# EAGLE board SGWB Circuit Test Board (EAGLE 9.5.0)
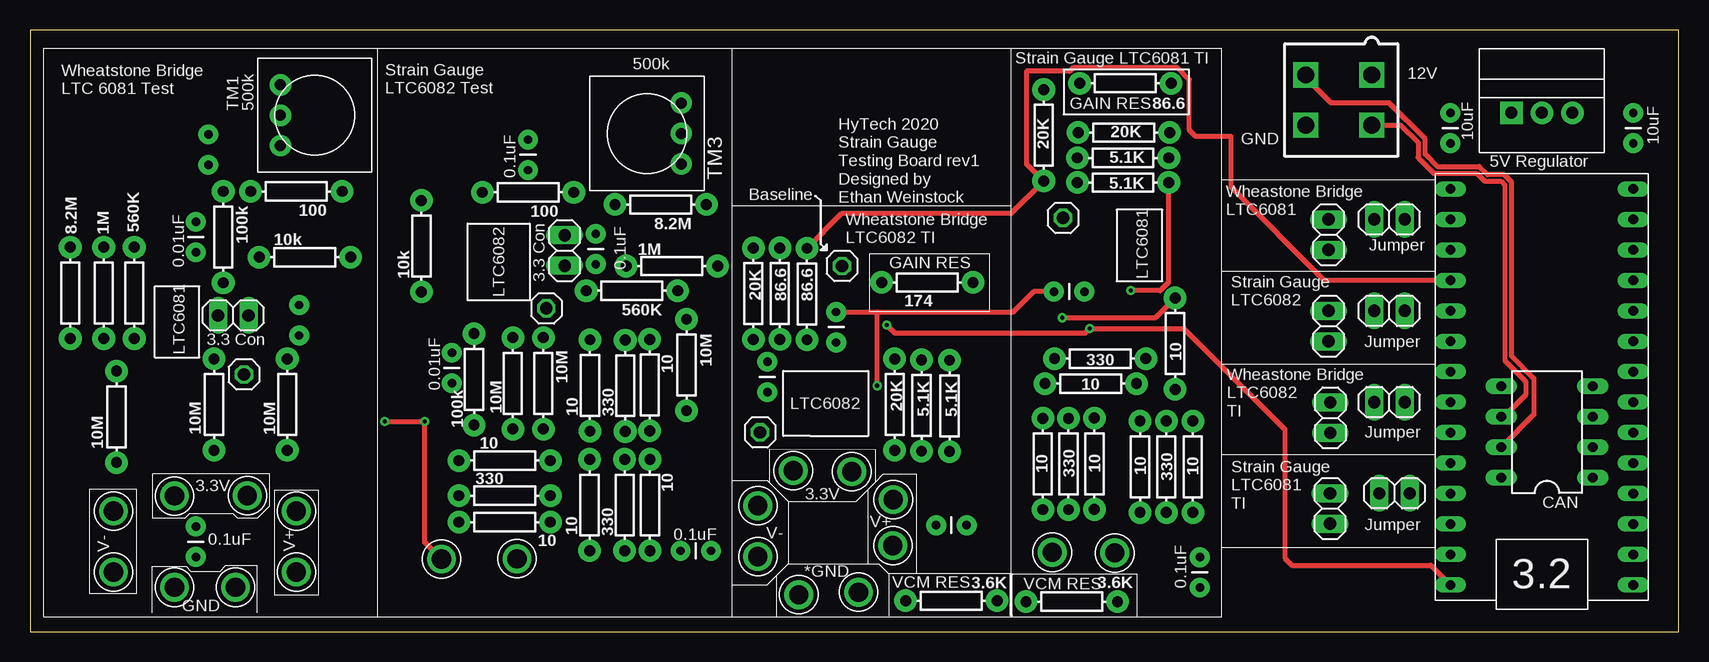
[diagram p0: board, top side]
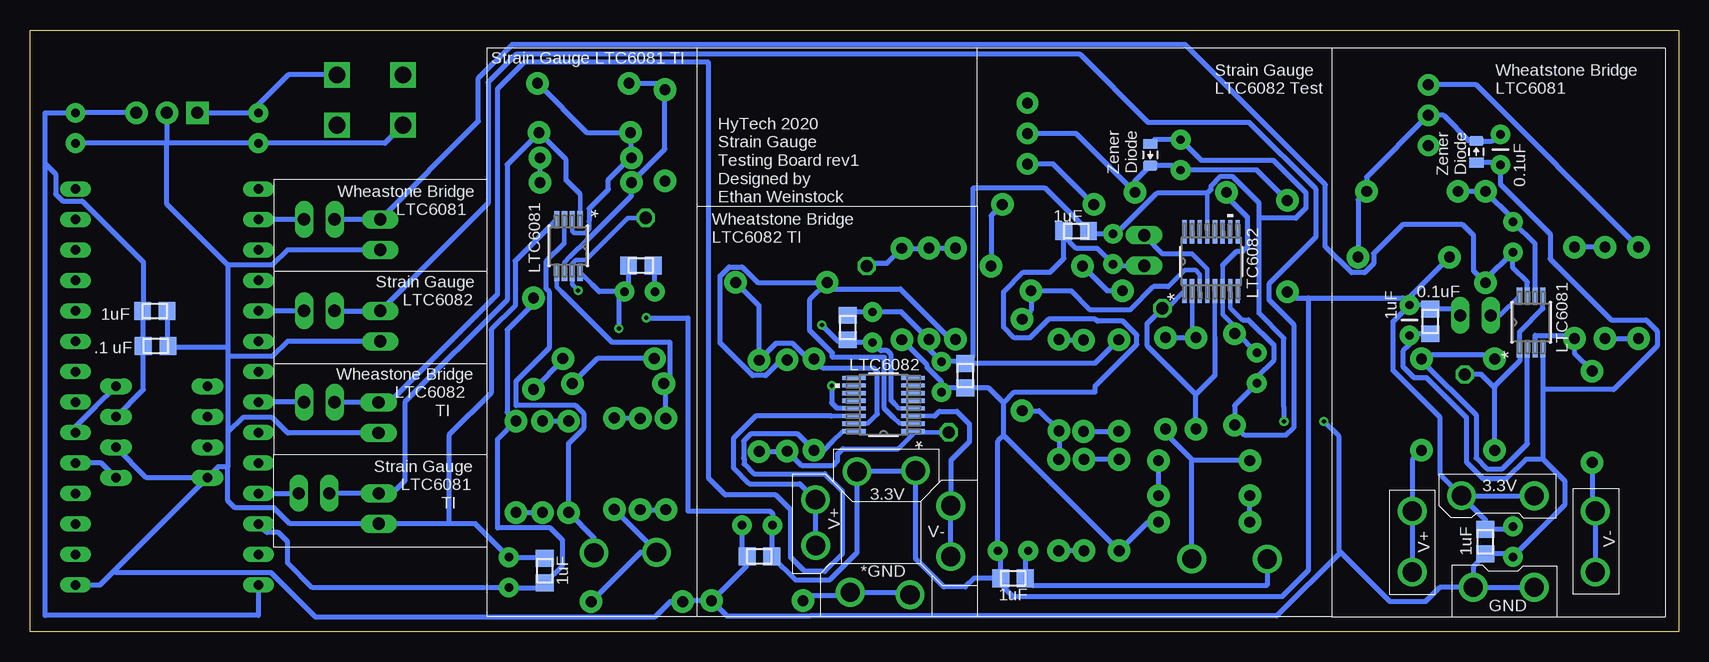
[diagram p1: board, bottom side, seen from below]

Size 137.39 x 50.19 mm. Coordinates in mm from the lower left corner, seen from the top.
Outline: 0,0 137.39,0 137.39,50.19 0,50.19 0,0
Copper layers (1*16): Top 0.035mm / dielectric 1.5mm / Bottom 0.035mm
Design rules "DRC Advanced Circuits": minimum track width 6mil, minimum drill 10mil, track to track 6mil, track to pad 6mil, pad to pad 6mil, via to via 6mil, smd to smd 6mil, copper to edge 40mil, drill to drill 6mil, minimum pad ring 10mil, minimum via ring 8mil, stop-mask expansion 4mil, vias tented up to drill 0mil, thermal gap 10mil

## Footprints (pad centres in the part's own frame; a part is rotated, then mirrored left to right if it is on the bottom)
0805 = smd 1.4 x 1.5: 1 -1.025,0; 2 1.025,0
CAP-PTH-SMALL = drill 0.7 pad 1.651: 1 0,0; 2 2.54,0
1X02 = drill 1.016 long: 1 -1.27,0; 2 1.27,0
0805_D = smd 0.8 x 1.2: A -0.9,0; C 0.9,0
AXIAL-0.3 = drill 0.9 pad 1.88: P$1 -3.81,0; P$2 3.81,0
OKI-78SR = drill 1 pad 1.88 square: 1 -2.54,0 | drill 1 pad 1.88: 2 0,0; 3 2.54,0
TRIM-3386 = drill 0.9 pad 1.778: 1 -2.54,-2.857; 2 0,-2.857; 3 2.54,-2.857
SSOP-16_GN = smd 1.981 x 0.356: 1 -2.464,2.223; 2 -2.464,1.587; 3 -2.464,0.953; 4 -2.464,0.318; 5 -2.464,-0.318; 6 -2.464,-0.953; 7 -2.464,-1.587; 8 -2.464,-2.223; 9 2.464,-2.223; 10 2.464,-1.587; 11 2.464,-0.953; 12 2.464,-0.318; 13 2.464,0.318; 14 2.464,0.953; 15 2.464,1.587; 16 2.464,2.223
MSOP-8_MS = smd 1.397 x 0.432: 1 -2.21,0.975; 2 -2.21,0.325; 3 -2.21,-0.325; 4 -2.21,-0.975; 5 2.21,-0.975; 6 2.21,-0.325; 7 2.21,0.325; 8 2.21,0.975
TEENSY_3.2_SIMPLE = drill 0.8 long: 3.3V 16.51,29.21; A0 16.51,3.81; A1 16.51,6.35; A2 16.51,8.89; A3 16.51,11.43; A4 16.51,13.97; A5 16.51,16.51; A6 16.51,19.05; A7 16.51,21.59; A8 16.51,24.13; A9 16.51,26.67; AGND 16.51,31.75; D0(RX1) 1.27,31.75; D1(TX1) 1.27,29.21; D2 1.27,26.67; D3(CANTX) 1.27,24.13; D4(CANRX) 1.27,21.59; D5 1.27,19.05; D6 1.27,16.51; D7(RX3) 1.27,13.97; D8(TX3) 1.27,11.43; D9(RX2) 1.27,8.89; D10(TX2) 1.27,6.35; D11 1.27,3.81; D12 1.27,1.27; D13 16.51,1.27; GND 1.27,34.29; VIN 16.51,34.29
DIL08 = drill 0.813 long: 1 -3.81,-3.81; 2 -1.27,-3.81; 3 1.27,-3.81; 4 3.81,-3.81; 5 3.81,3.81; 6 1.27,3.81; 7 -1.27,3.81; 8 -3.81,3.81
TEST_POINT = drill 1.6: P$1 0,0
1X01 = drill 1.016 octagon: 1 0,0
MINIFIT_5566-4 = drill 1.4 square: 1 2.1,-2.75; 2 -2.1,-2.75; 3 2.1,2.75; 4 -2.1,2.75

## Placement (x,y rotation side)
C1  0.1uF  [0805]  20.7,25.88 90 bottom
C2  0.01uF  [CAP-PTH-SMALL]  13.82,34.19 270 top
C3  0.1uF  [CAP-PTH-SMALL]  14.86,38.94 90 bottom
C4  1uF  [CAP-PTH-SMALL]  22.43,27.25 270 bottom
C5  10uF  [CAP-PTH-SMALL]  118.36,40.74 90 top
C6  10uF  [CAP-PTH-SMALL]  133.6,40.74 90 top
C7  .1 uF  [0805]  126.92,23.85 180 bottom
C8  1uF  [0805]  127,26.75 180 bottom
C9  1uF  [0805]  86.49,30.56 0 bottom
C10  0.1uF  [CAP-PTH-SMALL]  85.32,28.37 0 top
C11  0.1uF  [CAP-PTH-SMALL]  56.74,6.76 180 top
C12  1uF  [0805]  55.47,4.47 0 bottom
C13  0.1uF  [CAP-PTH-SMALL]  75.51,8.89 0 top
C14  0.01uF  [CAP-PTH-SMALL]  35.15,23.27 270 top
C15  0.1uF  [CAP-PTH-SMALL]  47.14,33.2 270 top
C16  1uF  [0805]  50.22,33.4 0 bottom
C17  0.1uF  [CAP-PTH-SMALL]  41.5,41.05 270 top
C18  1uF  [0805]  76.61,6.3 180 bottom
C19  1uF  [0805]  59.44,21.36 90 bottom
C20  1uF  [0805]  69.27,25.37 90 bottom
C21  0.1uF  [CAP-PTH-SMALL]  13.82,8.79 270 top
C22  1uF  [0805]  16.1,7.52 270 bottom
C23  0.1uF  [CAP-PTH-SMALL]  67.18,26.67 270 top
C24  0.1uF  [CAP-PTH-SMALL]  61.44,22.53 270 top
C26  0.1uF  [CAP-PTH-SMALL]  97.49,3.68 90 top
C27  1uF  [0805]  94.49,5.11 90 bottom
J1  JUMPER.1  [1X02]  113.28,34.39 180 top
J2  JUMPER.1  [1X02]  113.28,26.77 180 top
J3  JUMPER.1  [1X02]  113.28,19.15 180 top
J4  JUMPER.1  [1X02]  113.72,11.56 180 top
J5  JUMPER.1  [1X02]  44.55,31.8 90 top
J6  JUMPER.1  [1X02]  16.94,26.39 180 top
JP1  M02  [1X02]  108.2,33.12 90 top
JP2  M02  [1X02]  108.36,17.86 90 top
JP3  M02  [1X02]  108.2,25.5 90 top
JP4  M02  [1X02]  108.33,10.29 90 top
LT1790B  1.25V  [0805_D]  16.87,40.03 90 bottom
LT1790B2  1.25V  [0805_D]  44.04,39.78 270 bottom
R1  10M  [AXIAL-0.3]  21.44,18.95 90 top
R1_1  5.1K  [AXIAL-0.3]  91.08,39.52 0 top
R1_2  20K  [AXIAL-0.3]  91.16,41.63 0 top
R1_3  5.1K  [AXIAL-0.3]  91.08,37.46 0 top
R1_4  20K  [AXIAL-0.3]  84.48,41.4 90 top
R1_5  20K  [AXIAL-0.3]  60.27,28.19 270 top
R1_6  5.1K  [AXIAL-0.3]  76.63,18.85 270 top
R1_7  20K  [AXIAL-0.3]  72.06,18.95 270 top
R1_8  5.1K  [AXIAL-0.3]  74.29,18.87 270 top
R1_9  174  [AXIAL-0.3]  74.78,29.13 0 top
R1_11  86.6  [AXIAL-0.3]  91.29,45.75 0 top
R2  10M  [AXIAL-0.3]  7.21,17.93 90 top
R3  8.2M  [AXIAL-0.3]  3.35,28.27 90 top
R4  10M  [AXIAL-0.3]  15.34,18.95 90 top
R5  100k  [AXIAL-0.3]  16.1,32.92 270 top
R6  100  [AXIAL-0.3]  22.2,36.73 180 top
R7  10k  [AXIAL-0.3]  22.91,31.24 180 top
R9  3.6K  [AXIAL-0.3]  86.82,2.51 0 top
R10  330  [AXIAL-0.3]  94.69,13.77 270 top
R11  10  [AXIAL-0.3]  96.9,13.77 90 top
R12  10  [AXIAL-0.3]  92.51,13.77 90 top
R14  86.6  [AXIAL-0.3]  64.74,28.17 270 top
R15  10  [AXIAL-0.3]  39.55,14.27 0 top
R16  10  [AXIAL-0.3]  51.66,10.57 90 top
R17  10  [AXIAL-0.3]  51.64,20.57 270 top
R18  10M  [AXIAL-0.3]  42.77,20.73 90 top
R19  10M  [AXIAL-0.3]  54.71,22.25 90 top
R20  8.2M  [AXIAL-0.3]  52.55,35.64 180 top
R21  10M  [AXIAL-0.3]  40.23,20.73 90 top
R22  100k  [AXIAL-0.3]  37.01,21.06 270 top
R23  100  [AXIAL-0.3]  41.5,36.65 180 top
R24  10k  [AXIAL-0.3]  32.61,32.16 270 top
R25  10  [AXIAL-0.3]  95.43,24.03 270 top
R26  86.6  [AXIAL-0.3]  62.48,28.19 90 top
R27  330  [AXIAL-0.3]  86.54,14 270 top
R28  10  [AXIAL-0.3]  46.63,10.57 90 top
R29  3.6K  [AXIAL-0.3]  76.78,2.59 180 top
R31  10  [AXIAL-0.3]  88.39,20.7 180 top
R32  10  [AXIAL-0.3]  84.4,14 90 top
R39  330  [AXIAL-0.3]  49.61,20.52 90 top
R40  10  [AXIAL-0.3]  39.55,9.14 0 top
R41  330  [AXIAL-0.3]  89.18,22.78 180 top
R42  10  [AXIAL-0.3]  88.7,14.02 90 top
R44  330  [AXIAL-0.3]  49.56,10.57 270 top
R45  10  [AXIAL-0.3]  46.66,20.55 270 top
R46  330  [AXIAL-0.3]  39.55,11.35 180 top
R49  1M  [AXIAL-0.3]  53.49,30.51 180 top
R50  560K  [AXIAL-0.3]  50.16,28.45 180 top
R53  1M  [AXIAL-0.3]  6.15,28.27 90 top
R54  560K  [AXIAL-0.3]  8.69,28.27 90 top
REG  5V  [OKI-78SR]  125.98,43.28 0 top
TM1  500k  [TRIM-3386]  23.72,43.08 270 top
TM3  500k  [TRIM-3386]  51.41,41.55 90 top
U1  LTC6082CGNPBF  [SSOP-16_GN]  38.96,30.89 90 bottom
U2  LTC6082CGNPBF  [SSOP-16_GN]  66.27,18.95 180 bottom
U$1  LTC6081  [MSOP-8_MS]  12.29,25.81 90 bottom
U$2  TEENSY_3.2_SIMPLE  [TEENSY_3.2_SIMPLE]  134.87,38.2 180 top
U$3  MCP2551DIL  [DIL08]  126.42,16.66 90 top
U$4  TEST_POINT  [TEST_POINT]  68.48,13.36 0 top
U$5  TEST_POINT  [TEST_POINT]  90.4,6.58 0 top
U$6  TEST_POINT  [TEST_POINT]  85.19,6.63 0 top
U$7  TEST_POINT  [TEST_POINT]  71.93,11.02 270 top
U$8  TEST_POINT  [TEST_POINT]  34.29,6.07 0 top
U$9  LTC6081  [MSOP-8_MS]  92.53,32.18 270 bottom
U$10  TEST_POINT  [TEST_POINT]  40.59,6.1 0 top
U$11  TEST_POINT  [TEST_POINT]  12.04,11.33 0 top
U$12  TEST_POINT  [TEST_POINT]  22.2,4.98 270 top
U$13  TEST_POINT  [TEST_POINT]  22.2,10.06 270 top
U$14  TEST_POINT  [TEST_POINT]  17.12,3.71 0 top
U$15  TEST_POINT  [TEST_POINT]  12.04,3.71 0 top
U$16  TEST_POINT  [TEST_POINT]  6.96,10.06 90 top
U$17  TEST_POINT  [TEST_POINT]  6.96,4.98 90 top
U$18  TEST_POINT  [TEST_POINT]  18.11,11.35 0 top
U$19  TEST_POINT  [TEST_POINT]  71.91,7.19 270 top
U$20  TEST_POINT  [TEST_POINT]  69.04,3.3 0 top
U$21  TEST_POINT  [TEST_POINT]  64.06,3.1 0 top
U$22  TEST_POINT  [TEST_POINT]  60.66,10.52 270 top
U$23  TEST_POINT  [TEST_POINT]  60.66,6.27 270 top
U$24  TEST_POINT  [TEST_POINT]  63.6,13.44 0 top
U$25  M01  [1X01]  86.08,34.52 0 top
U$26  M01  [1X01]  60.83,16.64 0 top
U$27  M01  [1X01]  43.03,26.97 0 top
U$28  M01  [1X01]  17.83,21.46 0 top
U$29  M01  [1X01]  67.67,30.51 0 top
X1  CONNECTOR-4  [MINIFIT_5566-4]  109.07,44.35 90 top

## Library data of the parts
C1-C24 C26 C27 J1-J6 JP1-JP4 LT1790B LT1790B2 R1 R1_1-R1_9 R1_11 R2-R7 R9-R12 R14-R29 R31 R32 R39-R42 R44-R46 R49 R50 R53 R54 REG TM1 TM3 U$1-U$29 = HyTechDevices
U1 U2 = HyTechDevices; MANUFACTURER_PART_NUMBER: LTC6082CGN#PBF; VENDOR: Linear Technology
X1 = HyTechDevices; OC_FARNELL: unknown; OC_NEWARK: unknown

## Nets
3V3: C1.2 C4.1 C11.1 C12.1 C13.1 C15.2 C16.1 C18.1 C19.1 C21.1 C22.1 C24.2 C26.1 C27.1 J5.1 J6.1 R7.P$2 R11.P$2 R14.P$2 R24.P$2 R25.P$1 R28.P$1 R40.P$2 U$2.3.3V U$4.P$1 U$11.P$1 U$18.P$1 U$24.P$1
+5V: C6.2 C7.2 C8.2 C9.1 C10.2 C20.1 C23.2 REG.3 U2.4 U$2.VIN U$3.3 U$9.8
+12V: C5.2 REG.1 X1.1
CANH: U$3.7 X1.3
CANL: U$3.6 X1.2
GND: C1.1 C3.1 C4.2 C5.1 C6.1 C7.1 C8.1 C9.2 C10.1 C11.2 C12.2 C13.2 C15.1 C16.2 C17.1 C18.2 C19.2 C20.2 C21.2 C22.2 C23.1 C24.1 C26.2 C27.2 JP1.1 JP2.1 JP3.1 JP4.1 LT1790B2.A LT1790B.A R9.P$1 R26.P$1 R29.P$1 R45.P$1 REG.2 U1.13 U2.13 U$1.4 U$2.GND U$3.2 U$3.8 U$8.P$1 U$9.4 U$14.P$1 U$15.P$1 X1.4
INB-: C2.1 R5.P$1 R6.P$2 U$1.6
N$1: R1.P$2 R4.P$2 U$1.2
N$2: R2.P$2 R54.P$1 U$1.3
N$3: C3.2 LT1790B.C R6.P$1 R7.P$1 TM1.2
N$4: J1.1 U$2.A0
N$5: R3.P$2 TM1.1
N$6: U$2.D3(CANTX) U$3.1
N$7: J2.1 U$2.A3
N$8: J3.1 U$2.A6
N$9: U$2.D4(CANRX) U$3.4
N$10: R1_3.P$1 R1_4.P$2 R1_11.P$1 U$9.6
N$11: R10.P$1 R12.P$2
N$12: R10.P$2 R11.P$1
N$13: R16.P$2 R17.P$2 R19.P$1
N$14: J5.2 U1.4
N$15: J6.2 U$1.8
N$16: C17.2 LT1790B2.C R23.P$1 R24.P$1 TM3.2
N$17: R20.P$2 TM3.1
N$18: R1_1.P$1 R1_2.P$1 R1_11.P$2 U$9.2
N$19: R27.P$2 R32.P$1
N$20: R31.P$1 R41.P$2
N$21: R16.P$1 R44.P$2
N$22: J4.1 U$2.A9
N$23: R29.P$2 U$20.P$1 U$21.P$1
N$24: R17.P$1 R39.P$2
N$25: R25.P$2 R41.P$1
N$31: R27.P$1 R42.P$2
N$33: R28.P$2 R44.P$1
N$34: R39.P$1 R45.P$2
N$35: R15.P$2 R46.P$1
N$36: R40.P$1 R46.P$2
N$41: R20.P$1 R49.P$1
N$42: R49.P$2 R50.P$2
N$49: R3.P$1 R53.P$1
N$50: R53.P$2 R54.P$2
OUT1: R4.P$1 U$1.1 U$1.5 U$28.1
OUT4: R21.P$1 U1.1 U1.5 U$27.1
OUT4A+: R19.P$2 R50.P$1 U1.3
OUT4A-: R18.P$2 R21.P$2 U1.2
SG_BOT: R9.P$2 R42.P$1 U$6.P$1
SG_V1: R31.P$2 R32.P$2 U$9.5
SG_V2: R12.P$1 U$5.P$1 U$9.3
SGTIVOUT: R1_1.P$2 R1_3.P$2 U$9.7 U$25.1
V+1: R1.P$1 U$12.P$1 U$13.P$1
V-1: R2.P$1 U$16.P$1 U$17.P$1
V_BASE: R1_4.P$1 R1_5.P$1 R14.P$1 R26.P$2 U$2.A2 U$29.1
VOUT1: C2.2 J1.2 JP1.2 R5.P$2 U$1.7
VOUT2: J3.2 JP2.2 R1_7.P$2 U2.16
VOUT3: J4.2 JP4.2 R1_2.P$2 U$9.1
VOUT4: C14.2 J2.2 JP3.2 R22.P$2 U1.7
VOUT4-: C14.1 R22.P$1 R23.P$2 U1.6
VR4-2: R15.P$1 R18.P$1 U$10.P$1
VREF: R1_5.P$2 R1_8.P$1 R1_9.P$1 U2.2
WBV1: U2.3 U$22.P$1 U$23.P$1
WBV1OUT: R1_6.P$2 R1_8.P$2 U2.1 U$26.1
WBV2: U2.14 U$7.P$1 U$19.P$1
WBV2-I: R1_6.P$1 R1_7.P$1 R1_9.P$2 U2.15

## Tracks (layer width: path | path; a pad name or v marks a point on that pad's centre or on a via)
3V3  (via drill 0.35)
  Top 0.406: v86.03,26.19 93.78,26.19 R25.P$1
  Bottom 0.406: U$18.P$1 12.06,11.35 U$11.P$1 | C12.1 56.5,6.51 C11.1 56.74,15.9 56.26,16.38 | C12.1 56.49,3.95 55.49,2.95 33.04,2.95 30.84,5.15 30.84,27.84 | C21.1 14.06,8.54 C22.1 16.1,9.35 U$18.P$1 | U$18.P$1 19.89,13.13 19.89,17.87 23.8,21.78 23.8,25.88 C4.1 | 56.26,19.08 55.35,19.99 48.63,19.99 48.63,20.5 45.16,23.97 45.16,24.75 46.32,25.91 48.46,25.91 48.63,26.09 52.49,26.09 54.07,24.51 55.35,24.51 56.26,25.42 56.26,28.35 54.62,30 52.38,30 51.24,31.14 51.24,33.03 | R24.P$2 32.11,27.84 30.84,27.84 | 30.84,27.84 23.01,27.84 C4.1 | U$2.3.3V 117.66,8.29 116.7,8.29 115.93,7.52 115.93,5.74 113.87,3.68 C26.1 94.88,3.68 C27.1 93.01,5.55 93.01,7.65 94.03,8.66 98.43,8.66 98.43,16.05 R11.P$2 97.64,18.31 97.64,25.17 95.43,27.38 R25.P$1 | 56.26,16.38 R28.P$1 44.25,9.14 R40.P$2 | 56.26,16.38 56.26,19.08 | C12.1 58.7,4.47 59.44,3.73 61.24,3.73 63.6,6.1 U$24.P$1 68.4,13.44 U$4.P$1 68.48,6.6 70.76,4.32 73.6,4.32 C18.1 75.58,8.82 C13.1 75.5,9.85 75.74,10.08 82.57,10.08 82.57,26.19 v86.03,26.19 | R14.P$2 62.62,22.24 62.62,22.04 61.44,20.86 C24.2 61.1,20.34 C19.1 57.51,20.34 56.26,19.08 | J6.1 18.73,26.91 C1.2 21.05,27.25 C4.1 | R7.P$2 22.43,27.91 C4.1 | 51.24,33.03 50.19,31.98 48.46,31.98 C15.2 47.01,30.53 J5.1 | 51.24,33.03 C16.1
+5V  (via drill 0.35)
  Top 0.406: U$2.VIN 116.71,5.56 105.16,5.56 104.57,6.15 104.57,16.89 96.16,25.3 v88.32,25.3 87.91,24.89 72.08,24.89 v71.4,25.57
  Bottom 0.356: U$9.8 90.5,28.91 | U2.4 64.99,18.63 65.38,19.02
  Bottom 0.406: U$2.VIN 118.36,1.37 136.14,1.37 136.14,39.04 | 136.14,39.04 136.14,43.28 C6.2 REG.3 | U$3.3 127.95,20.21 C7.2 127.95,26.67 | 127.95,26.67 C8.2 | 136.14,39.04 135.27,38.16 135.27,36.51 134.68,35.92 133.05,35.92 127.95,30.82 127.95,26.67 | 69.16,24.24 69.05,24.13 C23.2 66.5,23.44 65.96,23.44 65.63,23.12 65.63,19.28 65.38,19.02 | 69.16,24.24 C20.1 | v71.4,25.57 70.07,24.24 69.16,24.24 | C10.2 88.32,27.91 v88.32,25.3 | C10.2 87.51,28.72 C9.1 | C10.2 89.96,28.37 90.5,28.91
+12V
  Bottom 0.406: REG.1 C5.2 118.36,43.97 115.88,46.45 X1.1
CANH
  Top 0.406: U$3.7 125.32,18.11 125.32,21.13 123.47,22.99 123.47,37.49 122.83,38.13 121.46,38.13 120.78,38.81 117.27,38.81 116.26,39.83 116.26,41.12 113.28,44.09 108.43,44.09 106.32,46.21 X1.3
CANL
  Top 0.406: U$3.6 122.81,17.93 124.64,19.76 124.64,20.89 122.91,22.62 122.91,37.26 122.6,37.57 121.23,37.57 120.55,38.25 116.97,38.25 115.67,39.55 115.67,40.82 114.24,42.25 X1.2
GND  (via drill 0.35)
  Top 0.406: v29.57,17.55 v32.89,17.55 32.87,17.53 32.87,7.49 U$8.P$1 | C10.1 83.64,28.37 81.94,26.67 70.61,26.67 | C23.1 70.61,26.67 | 70.61,26.67 70.59,26.64 v70.59,20.53
  Bottom 0.356: U1.13 39.28,36.57
  Bottom 0.406: 120.9,16.61 119.64,17.88 117.19,17.88 115.9,16.59 JP2.1 | JP3.1 115.92,24.23 117.19,22.97 120.9,22.97 120.9,22.96 | 120.9,22.96 120.9,16.61 | JP1.1 115.92,31.85 117.19,30.59 120.9,30.59 120.9,30.58 | 120.9,30.58 120.9,23.75 | 120.9,23.75 120.9,22.96 | REG.2 125.98,40.74 | 125.98,40.74 125.98,35.66 120.9,30.58 | 125.98,40.74 C5.1 107.82,40.74 X1.4 | 125.98,40.74 C6.1 | U$14.P$1 U$15.P$1 | R45.P$1 46.68,24.36 48.65,22.39 C19.2 | LT1790B2.A 43.67,41.05 C17.1 39.78,39.32 33.77,39.32 31.06,36.61 31.06,35.32 31.9,34.49 34.97,34.49 34.98,34.49 | C11.2 54.45,6.51 C12.2 53.86,3.89 34.29,3.89 U$8.P$1 | U$14.P$1 17.12,5.48 C22.2 14.06,6.49 C21.2 9.5,10.57 9.5,12.6 11.32,14.42 | C1.1 22.24,24.86 C4.2 22.43,23.96 22.99,23.4 22.99,22.12 22.08,21.21 21.04,21.21 17.7,17.88 17.7,14.16 16.32,12.78 14.36,12.78 12.72,14.42 11.32,14.42 | LT1790B.A 14.89,39.13 C3.1 14.86,37.32 10.72,33.18 10.72,31.09 5.64,26.01 2.71,26.01 1.8,25.1 1.8,23.82 5.43,20.19 11.29,20.19 11.32,20.22 | U$1.4 11.32,20.22 | 11.32,20.22 11.32,14.42 | U$14.P$1 19.91,3.71 21.11,2.51 24.05,2.51 28.18,6.64 | 28.18,6.64 28.3,6.76 28.3,16.28 v29.57,17.55 | 34.98,34.49 34.98,26.57 32.91,24.5 32.91,18.75 32.89,18.74 v32.89,17.55 | 120.9,16.61 120.9,13.79 | 120.9,13.79 121.67,13.79 U$3.8 | U$2.GND 131.55,3.91 130.38,5.08 | 130.38,5.08 U$3.8 | U$3.8 127.69,12.85 U$3.2 | C8.1 125.9,26.67 C7.1 125.8,23.75 120.9,23.75 | 34.98,34.49 34.98,35.77 37.16,37.95 38.23,37.95 38.99,37.19 38.99,36.86 39.28,36.57 43.49,36.57 46.86,33.2 C15.1 48.99,33.2 C16.2 52.77,36.98 58.83,36.98 58.83,23 C19.2 | 120.9,13.79 120.9,10.92 120.32,10.34 117.07,10.34 115.75,9.02 JP4.1 102.49,9.02
  Bottom 0.406: C13.2 78.05,6.72 C18.2 77.63,5.55 R29.P$1 | C20.2 69,26.67 C23.1 64.77,26.67 R26.P$1 62.48,23.57 C24.1 59.58,22.53 C19.2 | U2.13 70.12,18.63 70.59,19.1 v70.59,20.53 | C27.2 94.58,6.22 C26.2 100.28,9.02 102.49,9.02 | R29.P$1 82.93,2.59 R9.P$1 84.04,2.51 85.34,1.22 113.59,1.22 117.29,4.92 130.22,4.92 130.38,5.08 | 102.49,9.02 102.49,16.41 98.96,19.94 98.96,25.2 96.98,27.18 96.98,30.92 U$9.4 | 28.18,6.64 33.5,1.32 72.41,1.32 72.44,1.3 79.3,1.3 R29.P$1 | C10.1 85.32,30.41 C9.2
INB-
  Bottom 0.406: R6.P$2 R5.P$1 13.82,34.44 C2.1 11.97,32.34 U$1.6
N$1
  Bottom 0.406: R4.P$2 15.7,23.11 21.08,23.11 R1.P$2 21.44,22.63 16.89,18.08 16.89,14.5 15.98,13.59 14.7,13.59 12.62,15.67 U$1.2
N$2
  Bottom 0.406: R2.P$2 8.69,23.22 R54.P$1 8.94,24.71 11.97,24.71 U$1.3
N$3
  Bottom 0.406: C3.2 15.55,40.93 LT1790B.C 17.45,40.93 19.6,43.08 TM1.2 26.01,37.93 R6.P$1 26.72,36.02 R7.P$1
N$4
  Bottom 0.406: J1.1 U$2.A0
N$5
  Bottom 0.406: R3.P$2 16.89,45.62 TM1.1
N$6
  Bottom 0.406: U$3.1 131.44,14.07 U$2.D3(CANTX)
N$7
  Bottom 0.406: J2.1 U$2.A3
N$8
  Bottom 0.406: J3.1 U$2.A6
N$9
  Bottom 0.406: U$3.4 131.94,18.76 131.94,18.73 133.6,17.07 U$2.D4(CANRX)
N$10
  Bottom 0.356: U$9.6 92.86,30.82 92.35,31.32
  Bottom 0.406: R1_11.P$1 85.01,45.75 R1_4.P$2 84.48,40.26 R1_3.P$1 87.27,36.35 90.91,32.72 90.96,32.72 92.35,31.32
N$11
  Bottom 0.406: R10.P$1 R12.P$2
N$12
  Bottom 0.406: R11.P$1 R10.P$2
N$13
  Bottom 0.406: R16.P$2 51.64,14.4 R17.P$2 53.32,18.44 R19.P$1
N$14
  Bottom 0.356: U1.4 39.28,30.24 40.39,31.34
  Bottom 0.406: 40.39,31.34 40.56,31.52 43,31.52 J5.2
N$15
  Bottom 0.356: U$1.8 14.89,26.39 J6.2
N$16
  Bottom 0.406: R24.P$1 35.15,38.51 C17.2 41.87,38.88 LT1790B2.C 45.31,37.61 R23.P$1 50.22,41.55 TM3.2
N$17
  Bottom 0.406: R20.P$2 52.12,39.01 TM3.1
N$18
  Bottom 0.356: 90.81,34.24 90.81,33.58 91.13,33.25 92.02,33.25 92.21,33.43 U$9.2
  Bottom 0.406: R1_11.P$2 90.98,41.63 R1_2.P$1 87.35,39.6 R1_1.P$1 87.4,39.52 89.19,37.73 89.19,36.89 90.81,35.28 90.81,34.24
N$19
  Bottom 0.406: R27.P$2 R32.P$1
N$20
  Bottom 0.406: R41.P$2 90.12,22.78 R31.P$1
N$21
  Bottom 0.406: R44.P$2 R16.P$1
N$22
  Bottom 0.406: U$2.A9 115.01,11.53 J4.1
N$23
  Bottom 0.406: R29.P$2 72.52,3.05 69.29,3.05 U$20.P$1 64.26,3.3 U$21.P$1
N$24
  Bottom 0.406: R17.P$1 51.59,24.33 R39.P$2
N$25
  Bottom 0.406: R41.P$1 92.99,22.66 R25.P$2
N$31
  Bottom 0.406: R27.P$1 88.67,17.81 R42.P$2
N$33
  Bottom 0.406: R28.P$2 R44.P$1
N$34
  Bottom 0.406: R39.P$1 46.68,16.71 R45.P$2
N$35
  Bottom 0.406: R15.P$2 R46.P$1
N$36
  Bottom 0.406: R40.P$1 R46.P$2
N$41
  Bottom 0.406: R20.P$1 57.3,34.7 R49.P$1
N$42
  Bottom 0.406: R49.P$2 47.62,28.45 R50.P$2
N$49
  Bottom 0.406: R53.P$1 R3.P$1
N$50
  Bottom 0.406: R53.P$2 R54.P$2
OUT1
  Bottom 0.406: 15.34,20.35 15.34,20.51 13.27,22.58 U$1.1 13.27,25.01 11.32,26.96 U$1.5 | R4.P$1 15.34,20.35 | 15.34,20.35 16.46,21.46 U$28.1
OUT4
  Bottom 0.356: U1.5 38.65,24.57 | U1.1 42.63,26.97 U$27.1
  Bottom 0.406: R21.P$1 40.23,19.81 | 40.23,19.81 44.32,23.89 44.32,25.68 U$27.1 | 40.23,19.81 38.65,21.39 38.65,24.57
OUT4A+
  Bottom 0.356: U1.3 39.92,29.81 40.26,30.15 41.18,30.15 42.56,28.78
  Bottom 0.406: R19.P$2 53.98,26.8 R50.P$1 50.65,28.45 49.1,26.9 45.65,26.9 43.77,28.78 42.56,28.78
OUT4A-
  Bottom 0.356: U1.2 40.55,24.85
  Bottom 0.406: R18.P$2 R21.P$2 40.55,24.85
SG_BOT
  Bottom 0.406: R9.P$2 86.51,6.63 U$6.P$1 85.19,6.71 R42.P$1
SG_V1
  Bottom 0.356: U$9.5 93.51,28.77 93.14,28.4
  Bottom 0.406: R32.P$2 84.4,20.52 R31.P$2 84.58,20.9 84.05,21.43 84.05,24.13 88.87,24.13 93.14,28.4
SG_V2
  Bottom 0.356: U$9.3 92.86,32.42 92.89,32.38
  Bottom 0.406: U$5.P$1 90.4,7.85 R12.P$1 92.51,15.72 91.21,17.01 91.21,18.16 91.92,18.87 96.9,18.87 96.9,20.88 94.13,23.65 94.13,28.37 94.41,28.65 94.41,30.86 92.89,32.38
SGTIVOUT  (via drill 0.35)
  Top 0.406: v91.72,28.47 91.75,28.45 94.18,28.45 94.87,29.13 94.87,37.44 R1_3.P$2
  Bottom 0.356: v91.72,28.47 92.21,28.96 U$9.7 92.21,30.7 91.91,31 91.1,31 87.58,34.52 U$25.1
  Bottom 0.406: R1_1.P$2 R1_3.P$2
V+1
  Bottom 0.406: U$12.P$1 U$13.P$1 22.2,14.38 R1.P$1
V-1
  Bottom 0.406: U$17.P$1 U$16.P$1 7.21,10.31 R2.P$1
V_BASE
  Top 0.406: R14.P$1 67.67,34.9 81.79,34.9 R1_4.P$1 83.03,39.04 83.03,46.74 86.64,46.74 86.94,47.04 95.63,47.04 96.62,46.05 96.62,41.83 97.16,41.3 100.1,41.3 100.1,37.08 107.87,29.31 U$2.A2
  Bottom 0.406: R1_5.P$1 R26.P$2 62.51,31.98 R14.P$1 65.99,30.73 67.44,30.73 U$29.1
VOUT1
  Bottom 0.406: J1.2 JP1.2 100.03,42.57 100.03,46.16 97.21,48.97 41.13,48.97 29.44,37.28 29.44,32.11 29.42,32.11 27.26,29.95 26.18,29.95 25.42,30.71 25.42,31.55 23.01,33.96 18,33.96 17.09,33.05 17.09,30.1 R5.P$2 16.1,29.36 C2.2 13.82,30.35 12.62,29.15 U$1.7
VOUT2
  Bottom 0.356: U2.16 69.66,16.73 70.56,15.82
  Bottom 0.406: 70.56,15.82 71.25,15.14 R1_7.P$2 73.41,16.48 77.34,16.48 77.93,15.9 77.93,14.5 77.88,14.45 77.88,14 77.06,13.18 71.15,13.18 69.72,11.76 69.72,6.45 71.15,5.03 72.85,5.03 74.02,6.2 74.02,10.15 75.27,11.4 79.45,11.4 80.85,12.8 80.85,47.5 96.22,47.5 98.45,45.26 98.45,28.14 107.47,19.13 JP2.2 111.99,19.13 J3.2
VOUT3
  Bottom 0.356: U$9.1 91.54,34.38 91.54,36.5
  Bottom 0.406: J4.2 JP4.2 107.19,11.56 106.15,12.6 106.15,19.15 97.64,27.66 97.64,38.96 R1_2.P$2 92.71,39.37 92.71,37.67 91.54,36.5
VOUT4
  Bottom 0.356: U1.7 37.38,27.01 36.37,26.01
  Bottom 0.406: J2.2 JP3.2 99.21,35.76 99.21,45.82 96.87,48.16 49.89,48.16 44.21,42.48 35.79,42.48 30.25,36.94 30.25,32.9 34.16,28.99 34.16,27.7 32.09,25.63 32.09,17.02 32.73,16.38 36.14,16.38 R22.P$2 37.01,18.87 C14.2 35.15,21.24 33.72,22.67 33.72,23.86 35.87,26.01 36.37,26.01
VOUT4-
  Bottom 0.356: 38.01,30.57 U1.6 38.01,26.48 37.01,25.48
  Bottom 0.406: C14.1 36.75,24.87 R22.P$1 37.01,25.48 | R23.P$2 37.69,36.33 35.95,34.59 35.95,32.11 36.31,31.75 36.83,31.75 38.01,30.57
VR4-2
  Bottom 0.406: R18.P$1 42.77,16.57 40.48,14.27 | R15.P$1 40.48,14.27 | U$10.P$1 40.59,14.17 40.48,14.27
VREF
  Bottom 0.356: U2.2 64.94,17.36 65.46,17.88
  Bottom 0.406: 65.46,17.88 66.19,18.62 66.19,22.89 70.54,22.89 70.54,23.27 72.44,25.17 72.44,27.66 R1_9.P$1 | R1_5.P$2 60.65,24.38 64.87,28.6 70.43,28.6 R1_9.P$1 | R1_9.P$1 76.76,29.13 78.05,30.43 79.12,30.43 79.88,29.67 79.88,24.08 77.17,21.36 76.09,21.36 74.77,22.68 R1_8.P$1
WBV1
  Bottom 0.356: U2.3 62.01,18
  Bottom 0.406: U$23.P$1 U$22.P$1 60.65,14.3 59.11,15.85 59.11,17.35 60.15,18.39 61.62,18.39 62.01,18
WBV1OUT
  Bottom 0.356: 65.05,15.27 63.8,16.51 U2.1 63.72,16.64 U$26.1
  Bottom 0.406: R1_6.P$2 74.32,15.04 R1_8.P$2 73.08,13.84 70.51,13.84 70.1,14.25 70.1,14.81 69.65,15.27 65.05,15.27
WBV2
  Bottom 0.356: U2.14 70.57,18 70.59,17.98
  Bottom 0.406: U$19.P$1 71.91,11 U$7.P$1 73.25,12.34 77.44,12.34 78.76,13.67 78.76,16.15 76.92,18 76.91,17.98 70.59,17.98
WBV2-I
  Bottom 0.356: U2.15 67.58,17.36 66.78,18.16
  Bottom 0.406: 66.78,18.16 66.78,21.68 67.07,21.97 71.27,21.97 R1_7.P$1 72.54,22.76 73.84,24.05 75.23,24.05 R1_6.P$1 76.63,27.18 R1_9.P$2

## Text on the board
tPlace: Wheatstone Bridge / LTC 6081 Test | Strain Gauge / LTC6082 Test | HyTech 2020 / Strain Gauge / Testing Board rev1 / Designed by / Ethan Weinstock | 3.3 Con | 3.3V | CAN | V+ | V- | *GND | VCM RES
bPlace: HyTech 2020 / Strain Gauge / Testing Board rev1 / Designed by / Ethan Weinstock | Wheastone Bridge / LTC6081 | Strain Gauge / LTC6082 | LTC6081 | Strain Gauge / LTC6081 / TI
tNames: Strain Gauge LTC6081 TI | 12V | GAIN RES | GND | 5V Regulator | Wheastone Bridge / LTC6081 | LTC6082 | Baseline | Wheatstone Bridge / LTC6082 TI | Jumper | GAIN RES | 3.3 Con | LTC6081 | Strain Gauge / LTC6082 | Jumper | LTC6081 | LTC6082 | Wheastone Bridge / LTC6082 / TI | Jumper | 3.3V | Strain Gauge / LTC6081 / TI | Jumper | V- | V+ | VCM RES | GND
bNames: Strain Gauge LTC6081 TI | Wheatstone Bridge / LTC6081 | Strain Gauge / LTC6082 Test | Zener / Diode | Zener / Diode | LTC6082 | Wheatstone Bridge / LTC6082 TI | LTC6081 | LTC6082 | Wheastone Bridge / LTC6082 / TI | 3.3V | 3.3V | V- | V+ | V- | V+ | *GND | GND